# Altium PCB PCB1.PcbDoc
Units mm, origin at the board's own origin, x right, y up, seen from the top; angles counter-clockwise.
Board outline 122.6 x 54.1 mm, 2 copper layers (Top Layer, Bottom Layer), stack 1.57 mm thick; 51 components, 44 nets, 154 pads, 10 vias.
Unrouted connection lines stored in the file: 38.
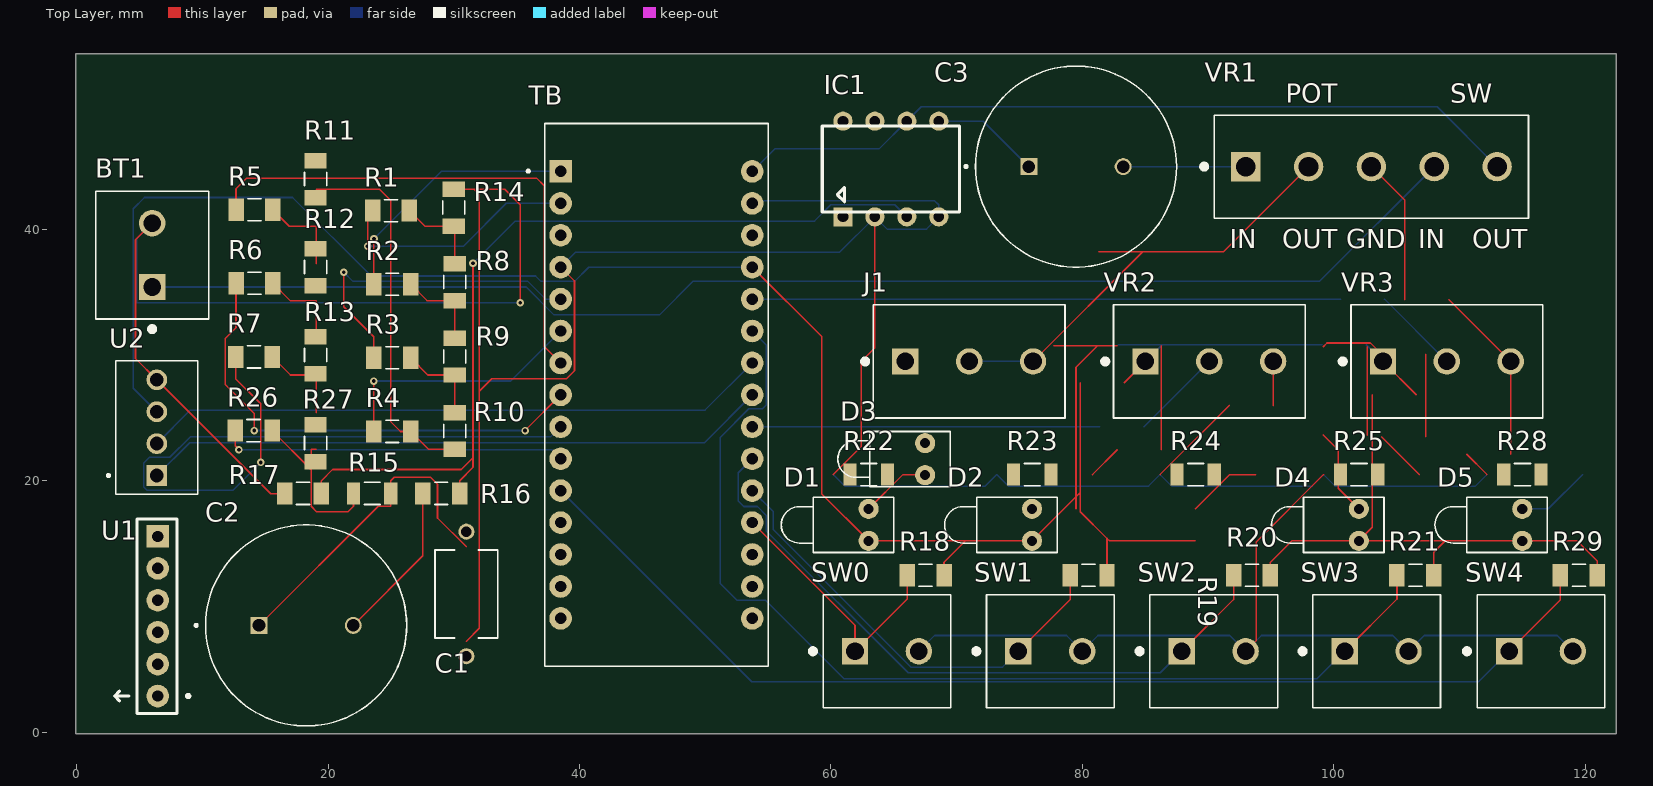
[diagram p0: Top Layer view]
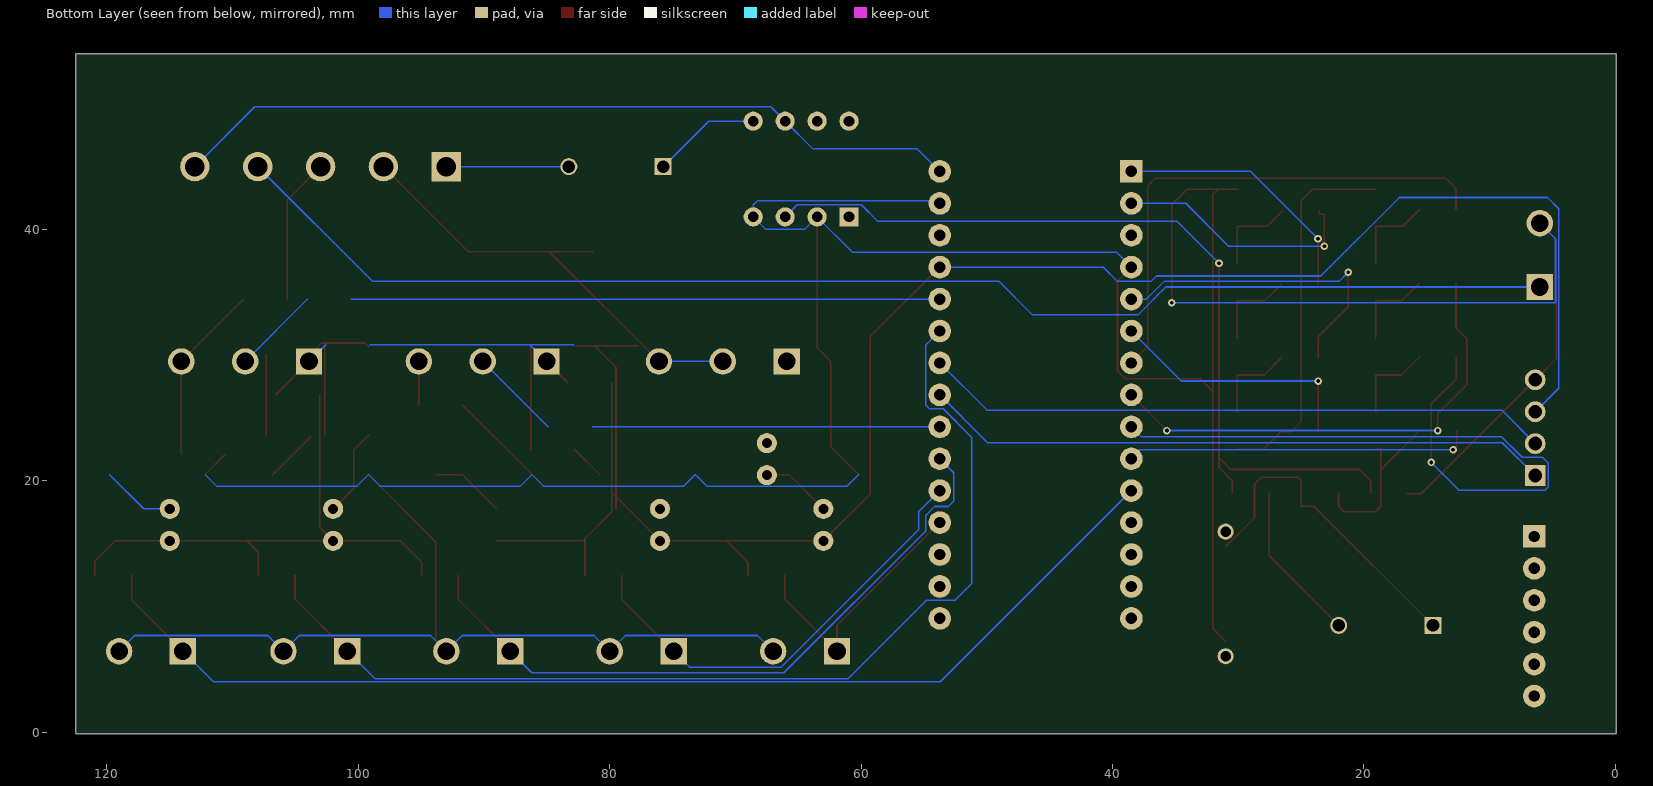
[diagram p1: Bottom Layer view, seen from below]
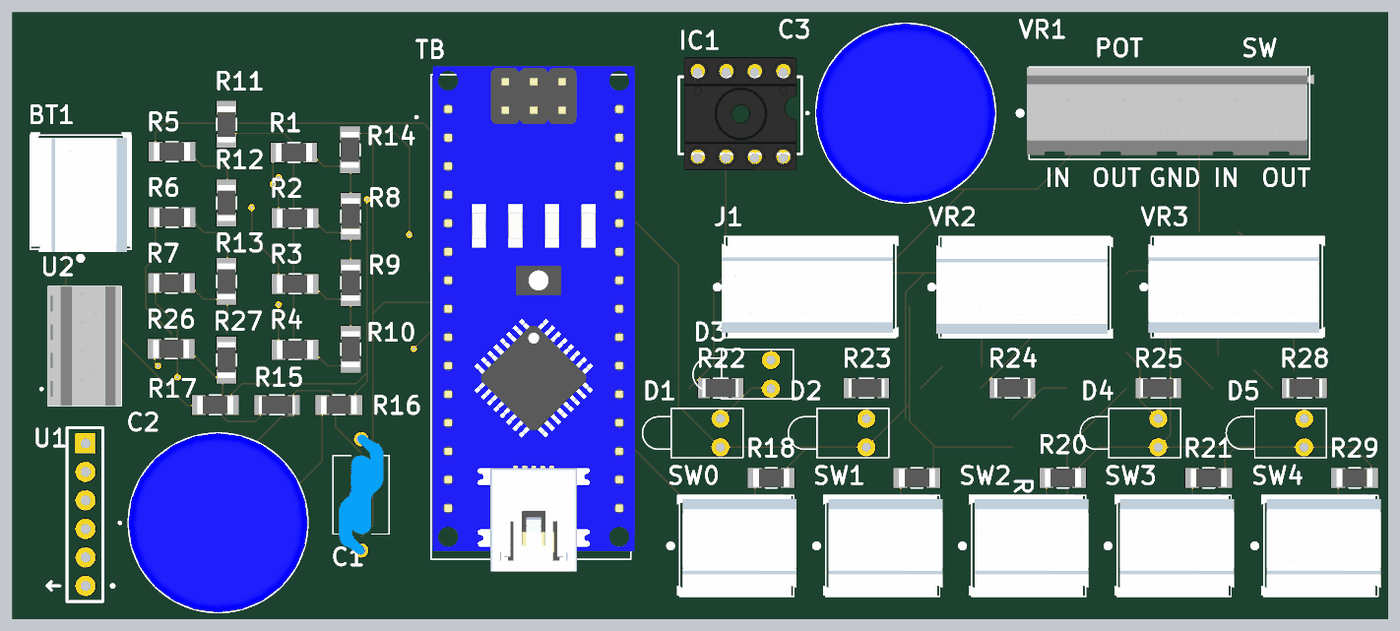
[diagram p2: 3D render of the assembled board from above, using the file's embedded part models]

## Layer stack, top to bottom
Top Solder: solder mask 0.0127, Solder Resist, Dk 3.8
Top Layer: signal copper 0.035
Dielectric: core 1.5, FR-4, Dk 4.5
Bottom Layer: signal copper 0.035
Bottom Solder: solder mask 0.0127, Solder Resist, Dk 3.8

## Board outline
-0.1,-0.1 122.5,-0.1 122.5,54 -0.1,54

## Design rules (kind name [scope] priority, off if disabled: settings)
BoardOutlineClearance [All] p1: gap=0.2 ignorepadtopadclearanceinfootprint=FALSE
Clearance [All] p1: gap=0.127 ignorepadtopadclearanceinfootprint=FALSE except(0.25: Arc-Hole Track-Hole SMDPad-Hole THPad-Hole Via-Hole Fill-Hole Poly-Hole Region-Hole Text-Hole)
ComponentClearance [All] p1: gap=0.127 collisioncheckmode=3 verticalgap=0.127 showdistances=TRUE
DiffPairsRouting [All] p1: maxlimit=0.254 minlimit=0.127 mostfreqgap=0.127 toplayer_minwidth=0.127 toplayer_maxwidth=25.4 toplayer_prefwidth=0.127 bottomlayer_minwidth=0.127 bottomlayer_maxwidth=25.4 bottomlayer_prefwidth=0.127 maxuncoupledlength=12.7
Height [All] p1: minheight=0 maxheight=1816.048 prefheight=12.7
HoleSize [All] p1: absolutevalues=TRUE maxlimit=6.3 minlimit=0.3 maxpercent=80.000 minpercent=20.000
HoleToHoleClearance [All] p1: gap=0.25 allowstackedmicrovias=FALSE
MinimumAnnularRing [All] p1: minimumring=0.076
MinimumSolderMaskSliver [All] p1: minsoldermaskwidth=0
PlaneClearance [All] p1: clearance=0.127
PlaneConnect PlaneConnectPowerPads [InPadClass('PowerPads')] p1: planeconnectstyle=Direct reliefexpansion=0.508 reliefentries=4 reliefconductorwidth=0.254 reliefairgap=0.254
PlaneConnect [All] p2: pad.planeconnectstyle=Relief pad.reliefexpansion=0.3 pad.reliefentries=4 pad.reliefconductorwidth=0.127 pad.reliefairgap=0.127 via.planeconnectstyle=Direct via.reliefexpansion=0.3 via.reliefentries=4 via.reliefconductorwidth=0.127 via.reliefairgap=0.127
PolygonConnect PolygonConnectPowerPads [All vs (InPadClass('PowerPads'))] p1: connectstyle=Direct reliefconductorwidth=0.254 reliefentries=4 polygonreliefangle="90 Angle" airgapwidth=0.254
PolygonConnect [All] p2: thpad.connectstyle=Relief thpad.reliefconductorwidth=0.127 thpad.reliefentries=4 thpad.polygonreliefangle="90 Angle" thpad.airgapwidth=0.127 smdpad.connectstyle=Relief smdpad.reliefconductorwidth=0.127 smdpad.reliefentries=4 smdpad.polygonreliefangle="90 Angle" smdpad.airgapwidth=0.127 via.connectstyle=Direct via.reliefconductorwidth=0.127 via.reliefentries=4 via.polygonreliefangle="90 Angle" via.airgapwidth=0.127
RoomDefinition Sheet1 [InComponentClass('Sheet1')] p1: confinementstyle=ConfineIn formatcopy=TRUE lockcomponents=FALSE outline 153.443,1.297 241.454,1.297 241.454,49.938 153.443,49.938
RoomDefinition Sheet2 [InComponentClass('Sheet2')] p2: confinementstyle=ConfineIn formatcopy=TRUE lockcomponents=FALSE outline 163.785,61.379 494.112,61.379 494.112,80.937 163.785,80.937
RoutingVias [All] p1: holewidth=0.3 width=0.6 viastyle="Through Hole" minholewidth=0.3 minwidth=0.6 maxholewidth=0.6 maxwidth=6.6
SilkToSilkClearance [All] p1: silktosilkclearance=0
SilkToSolderMaskClearance [IsPad] p1: minsilkscreentomaskgap=0.127 clearancetoexposedcopper=TRUE
SolderMaskExpansion [All] p1: expansion=0.075 istentingtop=FALSE
Width [All] p1: maxlimit=25.4 minlimit=0.127 preferedwidth=0.127 minimp=50.000000 maximp=50.000000 favimp=50.000000
20 further rules are at their usual default settings.

## Classes and differential pairs
component class Sheet2: BT1 C1 C2 D1 D2 D3 D4 D5 J1 R1 R2 R3 R4 R5 R6 R7 R8 R9 R10 R11 R12 R13 R14 R15 R16 R18 R19 R20 R21 R22 R23 R24 R25 R26 R27 R28 R29 SW0 SW1 SW2 SW3 SW4 VR2 VR3
component class Sheet1: C3 IC1 R17 TB U1 U2 VR1

## Components (designator, comment, footprint, x,y, rotation, side; value= is the part's Value field where it differs from the comment)
BT1 "9V BATTERY" "9V Battery" 6,37.96 r90 top
C1 "0.01uF CAP" "10uF CAP" 31,11 r270 top
C2 "220uF CAP" "220uF CAP" 18.25,8.5 r0 top
C3 "220uF CAP" "220uF CAP" 79.5,45 r0 top
D1 "LED0" LED-1 63,16.5 r180 top
D2 "LED1" LED-1 76,16.5 r180 top
D3 "LED2" LED-1 67.5,21.73 r180 top
D4 "LED3" LED-1 102,16.5 r180 top
D5 "LED3" LED-1 115,16.5 r180 top
IC1 "LM386 SOCKET" "LM386 SOCKET" 60.96,41 r0 top
J1 "AUDIO JACK" "AUDIO JACK" 71,29.5 r0 top
R1 "20K RES" "20K RES" 25,41.5 r0 top
R2 "20K RES" "20K RES" 25.103,35.643 r0 top
R3 "20K RES" "20K RES" 25.103,29.786 r0 top
R4 "20K RES" "20K RES" 25.103,23.929 r0 top
R5 "20K RES" "20K RES" 14.137,41.571 r0 top
R6 "20K RES" "20K RES" 14.137,35.714 r0 top
R7 "20K RES" "20K RES" 14.103,29.857 r0 top
R8 "10K RES" "10K RES" 30.069,35.811 r90 top
R9 "10K RES" "10K RES" 30.069,29.888 r90 top
R10 "10K RES" "10K RES" 30.069,23.966 r90 top
R11 "10K RES" "10K RES" 19,44 r90 top
R12 "10K RES" "10K RES" 19,37 r90 top
R13 "10K RES" "10K RES" 19,30 r90 top
R14 "20K RES" "20K RES" 30,41.733 r90 top
R15 "300 RES" "300 RES" 23.5,19 r0 top
R16 "20K RES" "20K RES" 29,19 r0 top
R17 "4.7K RES" "4.7K RES" 18,19 r180 top
R18 "10K RES" "10K RES" 67.534,12.5 r0 top
R19 "10K RES" "10K RES" 80.5,12.5 r0 top
R20 "10K RES" "10K RES" 93.5,12.5 r0 top
R21 "10K RES" "10K RES" 106.5,12.5 r0 top
R22 "150 RES" "150 RES" 63.015,20.5 r180 top
R23 "150 RES" "150 RES" 76.015,20.5 r180 top
R24 "150 RES" "150 RES" 89.015,20.5 r180 top
R25 "150 RES" "150 RES" 102.015,20.5 r180 top
R26 "20K RES" "20K RES" 14.069,24 r0 top
R27 "10K RES" "10K RES" 19,23 r90 top
R28 "150 RES" "150 RES" 115.015,20.5 r180 top
R29 "10K RES" "10K RES" 119.5,12.5 r0 top
SW0 "PUSH BUTTON" "Push Button" 64.455,6.444 r0 top
SW1 "PUSH BUTTON" "Push Button" 77.455,6.444 r0 top
SW2 "PUSH BUTTON" "Push Button" 90.455,6.444 r0 top
SW3 "PUSH BUTTON" "Push Button" 103.415,6.444 r0 top
SW4 "PUSH BUTTON" "Push Button" 116.495,6.444 r0 top
TB "ARDUINO_NANO" SHIELD_ARDUINO_NANO 46.12,26.84 r0 top
U1 "SD MODULE" "SD MODULE" 6.445,2.88 r180 top
U2 "LCD SCREEN" "LCD SCREEN" 6.368,24.23 r90 top
VR1 "POT WITH SPST" "POT WITH SPST" 93,45 r0 top
VR2 "10K POT" "10K POT" 90.104,29.5 r0 top
VR3 "50K POT" "50K POT" 109,29.5 r0 top

## Footprints (in the part's own frame and the unit in brackets; to place one, negate y for a bottom-side part, rotate by r counter-clockwise, add the part's x,y. Pads: shape width x height; smd on the part's side, far side on the other; paste and mask are expansions set on the pad)
"4.7K RES" [mm]
  rect 1.23x1.77 smd: 1(-1.466,0) 2(1.466,0)
  silkscreen extent -0.53,-0.88 0.53,0.88, body extent -1.6,-0.8 1.6,0.8, height 0.7
"9V Battery" [mm]
  rect 2.1x2.1 hole 1.4: 1(-2.54,0)
  round 2.1 hole 1.4: 2(2.54,0)
  silkscreen extent -6.09,-4.5 5.08,4.5, body extent -5.33,-4.52 5.33,4.48, height 15.2
"10K POT" [mm]
  rect 2.1x2.1 hole 1.4: 1(-5.08,0)
  round 2.1 hole 1.4: 2(0,0) 3(5.08,0)
  silkscreen extent -8.48,-4.5 7.62,4.5, body extent -7.87,-4.57 7.87,4.43, height 15.2
"10K RES" [mm]
  rect 1.23x1.77 smd: 1(-1.466,0) 2(1.466,0)
  silkscreen extent -0.53,-0.88 0.53,0.88, body extent -1.6,-0.8 1.6,0.8, height 0.7
"10uF CAP" [mm]
  round 1.28 hole 0.85: 1(-4.953,0) 2(4.953,0)
  silkscreen extent -3.5,-2.5 3.5,2.5, body extent -5.33,-2 5.33,2, height 10
"20K RES" [mm]
  rect 1.23x1.77 smd: 1(-1.466,0) 2(1.466,0)
  silkscreen extent -0.53,-0.88 0.53,0.88, body extent -1.6,-0.8 1.6,0.8, height 0.7
"50K POT" [mm]
  rect 2.1x2.1 hole 1.4: 1(-5.08,0)
  round 2.1 hole 1.4: 2(0,0) 3(5.08,0)
  silkscreen extent -8.48,-4.5 7.62,4.5, body extent -7.87,-4.44 7.87,4.56, height 15.2
"150 RES" [mm]
  rect 1.05x1.77 smd: 1(-1.485,0) 2(1.485,0)
  silkscreen extent -0.64,-0.88 0.64,0.88, body extent -1.6,-0.8 1.6,0.8, height 0.6
"220uF CAP" [mm]
  round 1.35 hole 1: N(3.75,0)
  rect 1.35x1.35 hole 1: P(-3.75,0)
  silkscreen extent -8.85,-8 8,8, body extent -8,-8 8,8, height 27
"300 RES" [mm]
  rect 1.05x1.77 smd: 1(-1.485,0) 2(1.485,0)
  silkscreen extent -0.64,-0.88 0.64,0.88, body extent -1.6,-0.8 1.6,0.8, height 0.6
"AUDIO JACK" [mm]
  rect 2.1x2.1 hole 1.4: 1(-5.08,0)
  round 2.1 hole 1.4: 2(0,0) 3(5.08,0)
  silkscreen extent -8.48,-4.5 7.62,4.5, body extent -7.87,-4.44 7.87,4.56, height 15.2
"LCD SCREEN" [mm]
  rect 1.65x1.65 hole 1.1: 1(-3.81,0)
  round 1.65 hole 1.1: 2(-1.27,0) 3(1.27,0) 4(3.81,0)
  silkscreen extent -5.31,-3.25 5.31,3.95, body extent -5.31,-3.25 5.31,3.25, height 10
LED-1 [mm] "LED; 2 Leads"
  round 1.6 hole 0.8: 1(0,1.27) 2(0,-1.27)
  silkscreen extent -2,-2.2 6.95,2.2
"LM386 SOCKET" [mil] "8 pin socket for LM386"
  rect 60x60 hole 33.07 mask+4: 1(0,0)
  round 60 hole 33.07 mask+4: 2(100,0) 3(200,0) 4(300,0) 5(300,300) 6(200,300) 7(100,300) 8(0,300)
  silkscreen extent -65,15 365,285, body extent -49,-44 349,354, height 110
"POT WITH SPST" [mm]
  rect 2.34x2.34 hole 1.56: 1(0,0)
  round 2.34 hole 1.56: 2(5,0) 3(10,0) 4(15,0) 5(20,0)
  silkscreen extent -3.5,-4.1 22.5,4.1, body extent -2.72,-4.14 22.88,4.06, height 5
"Push Button" [mm]
  rect 2.1x2.1 hole 1.4: 1(-2.54,0)
  round 2.1 hole 1.4: 2(2.54,0)
  silkscreen extent -6.09,-4.5 5.08,4.5, body extent -5.33,-4.43 5.33,4.57, height 15.2
"SD MODULE" [mm]
  round 1.8 hole 0.9: 1(0,0) 1(0,0) 2(0,-2.54) 2(0,-2.54) 3(0,-5.08) 3(0,-5.08) 4(0,-7.62) 4(0,-7.62) 5(0,-10.16) 5(0,-10.16) 6(0,-12.7)
  rect 1.8x1.8 hole 0.9: 6(0,-12.7)
  silkscreen extent -2.54,-14.1 3.43,1.4
SHIELD_ARDUINO_NANO [mm]
  rect 1.8x1.8 hole 0.9: 1(-7.62,17.78)
  round 1.8 hole 0.9: 2(-7.62,15.24) 3(-7.62,12.7) 4(-7.62,10.16) 5(-7.62,7.62) 6(-7.62,5.08) 7(-7.62,2.54) 8(-7.62,0) 9(-7.62,-2.54) 10(-7.62,-5.08) 11(-7.62,-7.62) 12(-7.62,-10.16) 13(-7.62,-12.7) 14(-7.62,-15.24) 15(-7.62,-17.78) 16(7.62,-17.78) 17(7.62,-15.24) 18(7.62,-12.7) 19(7.62,-10.16) 20(7.62,-7.62) 21(7.62,-5.08) 22(7.62,-2.54) 23(7.62,0) 24(7.62,2.54) 25(7.62,5.08) 26(7.62,7.62) 27(7.62,10.16) 28(7.62,12.7) 29(7.62,15.24) 30(7.62,17.78)
  silkscreen extent -10.3,-21.59 8.89,21.59, body extent -8.75,-22.67 9.25,22.33, height 10.1

## Part data
C1: "Lead Capacitor E(JIS) with Capacitance: 1000pF and Rated Voltage: 400Vac(r.m.s.)", Package="Radial Murata", Digi-Key_Part_Number=490-16237-1-ND, MF=Murata, Mouser-Purchase-URL=https://snapeda.com/shop?store=Mouser&id=4546572, MP=DE2E3SA102MN3AY02F, SnapEDA_Link=https://www.snapeda.com/parts/DE2E3SA102MN3AY02F/Murata/view-part/4546572/?ref=snap
C2 C3: "33ÂµF 250V Aluminum Electrolytic Capacitors Radial, Can 5000 Hrs @ 105Â°C", Package="Radial Nichicon", Availability=Warning, Check_prices=https://www.snapeda.com/parts/UPM2E330MHD1TN/Nichicon/view-part/2353634/?ref=eda, MF=Nichicon, MP=UPM2E330MHD1TN, Price=None, Purchase-URL=https://pricing.snapeda.com/search/part/UPM2E330MHD1TN/?ref=eda, SnapEDA_Link=https://www.snapeda.com/parts/UPM2E330MHD1TN/Nichicon/view-part/2353634/?ref=snap
D1 D3 D4 D5: library part LED1, "Typical RED GaAs LED", LatestRevisionDate=08-Jul-2005, LatestRevisionNote="Mech Layer 1 removed.", PackageDescription="LED; 2 Leads", PackageReference=LED-1, Published=8-Jun-2000, Publisher="Altium Limited"
D2: "Typical RED GaAs LED", LatestRevisionDate=08-Jul-2005, LatestRevisionNote="Mech Layer 1 removed.", PackageDescription="LED; 2 Leads", PackageReference=LED-1, Published=8-Jun-2000, Publisher="Altium Limited"
IC1: "8 pin IC socket for LM386"
J1: "3.5 mm, Stereo, Right Angle, Through Hole, Audio Jack Connector", Package=None, Availability=Unavailable, CUI_purchase_URL=https://www.cuidevices.com/product/interconnect/connectors/audio-connectors/jacks/sj1-353xn-series?utm_source=snapeda.com&utm_medium=referral&utm_campaign=snapedaBOM, MF="CUI Devices", MP=SJ1-3533N, Price=None, SnapEDA_Link=https://www.snapeda.com/parts/SJ1-3533N/CUI%20Devices/view-part/554489/?ref=snap
R1 R2 R3 R4 R5 R6 R7 R14 R16 R17 R26: Package=None, Availability=Unavailable, Price=None
  R1 R2 R3 R4 R5 R6 R7 R14 R16 R26: MP=RMCF1206JT20K0
  R17: MP=RMCF1206FT4K70
R8 R9 R10 R11 R12 R13 R18 R19 R20 R21 R27 R29: "10 kOhms Â±1% 0.25W, 1/4W Chip Resistor 1206 (3216 Metric) Automotive AEC-Q200 Thick Film", Package="3216 Stackpole", Check_prices=https://www.snapeda.com/parts/RMCF1206FT10K0/Stackpole%20Electronics%20Inc/view-part/3955491/?ref=eda, Digi-Key_Part_Number=RMCF1206FT10K0CT-ND, MF="Stackpole Electronics Inc", MP=RMCF1206FT10K0, Purchase-URL=https://pricing.snapeda.com/search/part/RMCF1206FT10K0/?ref=eda, SnapEDA_Link=https://www.snapeda.com/parts/RMCF1206FT10K0/Stackpole%20Electronics%20Inc/view-part/3955491/?ref=snap
R15: "CRCW Series 1206 0.25 W 300 Ohm Â±5 % Â±200 ppm/K SMT Thick Film Chip Resistor", Package=None, Availability=Unavailable, MP=CRCW1206300RJNEA, Price=None
R22 R23 R24 R25 R28: "Through Hole Carbon Film Resistor, Cfr Series, 150 Ohm, 500 Mw, - 5%, 350 V, Axial Leaded", Package="Axial TE Connectivity", Availability=Good, Check_prices=https://www.snapeda.com/parts/CFR50J150R/TE%20Connectivity/view-part/2667839/?ref=eda, MF="TE Connectivity", MP=CFR50J150R, Price=None, Purchase-URL=https://pricing.snapeda.com/search/part/CFR50J150R/?ref=eda, SnapEDA_Link=https://www.snapeda.com/parts/CFR50J150R/TE%20Connectivity/view-part/2667839/?ref=snap
SW0 SW1 SW2 SW3 SW4: "Push Button"
TB: "ATSAMD21G18A Arduino Nano 33 IoT SAM D ARMÂ® CortexÂ®-M0+ MCU 32-Bit Embedded Evaluation Board", Package=None, Availability=Unavailable, MF=Arduino, MP="ARDUINO NANO", Price=None, SnapEDA_Link=https://www.snapeda.com/parts/ARDUINO%20NANO/Arduino/view-part/1128261/?ref=snap
VR1: "Potentiometer with SPST Switch"
VR2: "POT 10K OHM 1/10W PLASTIC LOG", Package=None, Digi-Key_Part_Number=987-1304-ND, Digi-Key_Purchase_URL=https://www.digikey.cz/product-detail/en/tt-electronics-bi/P160KN-0QC15B500K/987-1304-ND/2408881?utm_source=snapeda&utm_medium=aggregator&utm_campaign=symbol, MF="TT Electronics/BI", MP=P160KN-0QC15B500K, SnapEDA_Link=https://www.snapeda.com/parts/P160KN-0QC15B500K/TT%20Electronics/BI/view-part/903272/?ref=snap
VR3: "POT 50K OHM 1/5W PLASTIC LINEAR", Package=None, Digi-Key_Part_Number=987-1304-ND, Digi-Key_Purchase_URL=https://www.digikey.cz/product-detail/en/tt-electronics-bi/P160KN-0QC15B500K/987-1304-ND/2408881?utm_source=snapeda&utm_medium=aggregator&utm_campaign=symbol, MF="TT Electronics/BI", MP=P160KN-0QC15B500K, SnapEDA_Link=https://www.snapeda.com/parts/P160KN-0QC15B500K/TT%20Electronics/BI/view-part/903272/?ref=snap

## Via types
v1: diameter 0.6, hole 0.3, Top Layer to Bottom Layer, 10 vias

## Nets (pads, with @x,y where several pads share a name; then routed paths per layer and width w, separated by ;. In a path a pad name is that pad's centre, name@x,y a point inside that pad or via, vN(x,y) a via of type N, cw(c..) or ccw(c..) an arc to the next point about the centre after c; other vN are vias at no path point)
5V: D1.1 D2.1 D3.1 D4.1 D5.1 R18.2 R19.2 R20.2 R21.2 R29.2 TB.27 U1.6 U2.3 VR2.1 VR3.1 | length 230.1
  Top Layer w0.127: TB.27 59.285,31.455 59.285,18.945 D1.1 70.716,15.23 ; R18.2 69,13.514 70.716,15.23 ; 77.726,30.761 81.226,30.761 ; 79.5,17.77 79.5,18.73 ; 79.834,27.81 79.834,19.064 ; R19.2 81.966,15.419 ; 82.78,30.761 81.226,30.761 ; 83.334,27.81 VR2.1 ; 89,15.23 82.155,15.23 81.966,15.419 ; R20.2 94.966,13.514 96.682,15.23 D4.1 ; 103.075,26.845 103.075,16.305 D4.1 ; VR3.1 106.575,26.845 ; R21.2 107.966,14.327 108.869,15.23 ; R29.2 120.966,13.63 119.366,15.23 D5.1 108.869,15.23 ; 70.716,15.23 D2.1 79.5,18.73 ; 79.5,18.73 79.5,29.035 81.226,30.761 ; 79.5,18.73 79.834,19.064 ; 79.834,19.064 79.834,17.552 81.966,15.419 ; D4.1 108.869,15.23
  Bottom Layer w0.127: U2.3 4.497,27.371 4.497,41.658 5.386,42.547 17.172,42.547 23.42,36.298 36.501,36.298 36.933,35.866 39.6,35.866 40.734,37 TB.27 ; 82.861,30.837 99.083,30.837 ; VR2.1 86.361,30.837 ; 102.583,30.837 VR3.1
+Input: IC1.3 R16.2 R17.1 | length 69.4
  Top Layer w0.127: R17.1 19.466,20.017 20.355,20.906 30.583,20.906 31.523,21.846 ; R16.2 30.466,20.017 31.523,21.074 31.523,21.846 ; v1(31.523,37.314) 31.523,21.846
  Bottom Layer w0.127: v1(31.523,37.314) 34.876,40.667 58.701,40.667 59.996,41.962 65.078,41.962 IC1.3
A0: R18.1 SW0.1 TB.19 | length 21.4
  Top Layer w0.127: TB.19 61.915,8.505 SW0.1 66.068,10.597 R18.1
A1: R19.1 SW1.1 TB.20 | length 36.1
  Top Layer w0.127: SW1.1 79.034,10.563 R19.1
  Bottom Layer w0.127: TB.20 55.424,17.536 55.424,16.105 66.346,5.183 73.654,5.183 SW1.1
A2: R20.1 SW2.1 TB.21 | length 54
  Top Layer w0.127: SW2.1 92.034,10.563 R20.1
  Bottom Layer w0.127: TB.21 52.63,20.65 52.63,18.391 53.062,17.959 54.154,17.959 54.866,17.248 54.866,16.004 66.143,4.726 86.197,4.726 SW2.1
A3: TB.22 VR2.2 | length 35
  Bottom Layer w0.127: TB.22 81.404,24.3 ; 84.904,24.3 VR2.2
A6: R21.1 SW3.1 TB.25 | length 84.2
  Top Layer w0.127: SW3.1 105.034,10.603 R21.1
  Bottom Layer w0.127: TB.25 54.84,30.82 54.84,26.011 54.561,25.732 53.469,25.732 51.208,23.471 51.208,11.813 52.529,10.492 54.789,10.492 61.012,4.269 98.7,4.269 SW3.1
A7: TB.26 VR3.2 | length 53.8
  Bottom Layer w0.127: TB.26 100.54,34.46 ; 104.04,34.46 VR3.2
"Audio In": C3.N VR1.1 | length 9.7
  Bottom Layer w0.127: C3.N VR1.1
"Audio Out": J1.2 J1.3 VR1.2 | length 36.9
  Top Layer w0.127: J1.3 84.809,38.229 ; 81.309,38.229 91.229,38.229 VR1.2
  Bottom Layer w0.127: J1.2 J1.3
D0: R1.1 TB.2 | length 20
  Top Layer w0.127: v1(23.141,38.66) 23.141,41.226 23.534,41.226 R1.1
  Bottom Layer w0.127: v1(23.141,38.66) 30.761,38.66 34.181,42.08 TB.2
D1: R2.1 TB.1 | length 20.7
  Top Layer w0.127: R2.1 23.637,39.258 v1(23.649,39.27)
  Bottom Layer w0.127: v1(23.649,39.27) 28.999,44.62 TB.1
D2: R3.1 TB.5 | length 26
  Top Layer w0.127: v1(21.236,36.603) 21.236,33.86 23.637,31.459 R3.1
  Bottom Layer w0.127: v1(21.236,36.603) 21.973,35.866 35.892,35.866 37.298,34.46 TB.5
D3: R4.1 TB.6 | length 20.5
  Top Layer w0.127: R4.1 v1(23.637,27.942)
  Bottom Layer w0.127: v1(23.637,27.942) 34.522,27.942 TB.6
D4: R5.1 TB.7 | length 41.4
  Top Layer w0.127: R5.1 12.671,43.247 13.514,44.091 36.583,44.091 37.187,43.486 37.187,30.693 TB.7
D5: R6.1 TB.8 | length 38.6
  Top Layer w0.127: R6.1 12.671,32.178 11.813,31.32 11.813,27.662 14.124,25.351 v1(14.124,24.005) ; v1(35.665,24.005) TB.8
  Bottom Layer w0.127: v1(14.124,24.005) v1(35.665,24.005)
D6: R7.1 TB.9 | length 55.8
  Top Layer w0.127: R7.1 12.637,28.119 14.632,26.124 v1(14.632,21.465)
  Bottom Layer w0.127: v1(14.632,21.465) 12.422,19.255 5.59,19.255 5.336,19.509 5.336,21.414 5.793,21.871 7.393,21.871 9.019,23.497 37.697,23.497 TB.9
D7: R26.1 TB.10 | length 27.5
  Top Layer w0.127: R26.1 12.603,22.782 v1(12.905,22.481)
  Bottom Layer w0.127: v1(12.905,22.481) 37.779,22.481 TB.10
D8: R29.1 SW4.1 TB.11 | length 90.5
  Top Layer w0.127: SW4.1 118.034,10.523 R29.1
  Bottom Layer w0.127: TB.11 53.705,4.015 111.526,4.015 SW4.1
GND: BT1.2 C1.2 IC1.2 IC1.4 J1.1 R14.2 R17.2 R22.1 R23.1 R24.1 R25.1 R28.1 SW0.2 SW1.2 SW2.2 SW3.2 SW4.2 TB.4 TB.29 U1.5 U2.4 VR1.3 VR2.3 VR3.3 | length 359.9
  Top Layer w0.127: BT1.2 4.675,39.175 4.675,29.733 U2.4 15.433,18.975 16.534,18.975 R17.2 ; R14.2 31.607,43.199 ; 31,7.25 32.031,8.281 32.031,27.129 ; v1(35.282,34.165) 35.282,41.962 34.046,43.199 31.607,43.199 ; TB.4 39.6,35.9 39.6,28.754 38.965,28.119 33.022,28.119 32.031,27.129 ; 60.19,20.5 62.42,22.73 62.42,29.5 63.5,30.58 IC1.2 ; SW2.2 93.855,7.304 93.855,15.165 99.19,20.5 ; 95.184,25.994 VR2.3 ; VR1.3 105.666,42.334 105.666,34.414 ; 109.166,34.414 VR3.3 114.08,22.11 ; 31.607,43.199 32.031,42.775 32.031,27.129
  Bottom Layer w0.127: BT1.2 4.751,39.251 4.751,34.165 v1(35.282,34.165) ; TB.4 39.703,38.203 60.703,38.203 IC1.2 64.468,40.032 67.612,40.032 IC1.4 68.58,41.962 68.25,42.293 53.953,42.293 TB.29 ; 60.19,20.5 61.105,19.585 72.275,19.585 73.19,20.5 74.105,19.585 85.275,19.585 86.19,20.5 87.105,19.585 98.275,19.585 99.19,20.5 100.105,19.585 111.275,19.585 112.19,20.5 ; SW0.2 68.249,7.698 78.741,7.698 SW1.2 81.249,7.698 91.741,7.698 SW2.2 94.249,7.698 104.701,7.698 SW3.2 107.209,7.698 117.781,7.698 SW4.2
"LP Filter": R15.1 R26.2 R27.1 | length 14.1
  Top Layer w0.127: R26.2 18.645,20.89 ; 19.069,22.5 18.645,22.5 18.645,20.89 ; R15.1 22.015,17.985 21.558,17.528 19.102,17.528 18.645,17.985 18.645,20.89
MISO: TB.15 U1.1
MOSI: TB.14 U1.4
NetC1_1: C1.1 C2.P R15.2 | length 26.5
  Top Layer w0.127: C2.P 23.985,17.985 24.985,17.985 R15.2 24.985,20.017 25.264,20.296 28.145,20.296 28.704,19.737 28.704,17.046 31,14.75
NetC2_N: C2.N R16.1 | length 12.8
  Top Layer w0.127: C2.N 27.534,14.034 R16.1
NetC3_P: C3.P IC1.5 | length 8.7
  Bottom Layer w0.127: IC1.5 72.13,48.62 C3.P
NetD1_2: D1.2 R22.2 | length 5.9
  Top Layer w0.127: D1.2 65.73,20.5 67.81,20.5
NetD2_2: D2.2 R23.2 | length 8.3
  Top Layer w0.127: 86.28,22.47 86.28,30.761
NetD3_2: D3.2 R24.2 | length 5.9
  Top Layer w0.127: 89,17.77 91.73,20.5 93.81,20.5
NetD4_2: D4.2 R25.2 | length 25.8
  Top Layer w0.127: 99.163,23.649 100.357,22.455 100.357,19.413 D4.2 ; 99.163,30.659 99.468,30.964 102.922,30.964 103.811,30.075 ; 102.663,23.649 102.663,30.659 ; 107.311,23.499 107.311,30.075
NetD5_2: D5.2 R28.2 | length 5.9
  Bottom Layer w0.127: D5.2 117.08,17.77 119.81,20.5
NetR1_2: R1.2 R8.2 R14.1 | length 7.1
  Top Layer w0.127: R1.2 27.699,40.267 R14.1 30.069,40.198 30.069,38.737 R8.2
NetR2_2: R2.2 R8.1 R9.2 | length 7
  Top Layer w0.127: R2.2 27.867,34.345 R8.1 R9.2
NetR3_2: R3.2 R9.1 R10.2 | length 7.1
  Top Layer w0.127: R3.2 27.932,28.422 R9.1 R10.2
NetR4_2: R4.2 R10.1 R11.2 | length 29.9
  Top Layer w0.127: 19.069,43.199 24.081,43.199 24.995,42.285 24.995,24.69 25.757,23.928 R4.2 27.998,22.5 R10.1
NetR5_2: R5.2 R11.1 R12.2 | length 7
  Top Layer w0.127: R5.2 16.907,40.267 19.069,40.267 19.069,37.277
NetR6_2: R6.2 R12.1 R13.2 | length 7
  Top Layer w0.127: R6.2 16.973,34.345 19.069,34.345 R13.2@19.069,31.354
NetR7_2: R7.2 R13.1 R27.2 | length 7.1
  Top Layer w0.127: R7.2 17.004,28.422 19.069,28.422 19.069,25.432
SCK: TB.16 U1.2
SCL: TB.24 U2.2 | length 50
  Bottom Layer w0.127: U2.2 9.038,25.63 49.99,25.63 TB.24
SDA: TB.23 U2.1 | length 50
  Bottom Layer w0.127: U2.1 8.988,23.039 49.939,23.039 TB.23
SS: TB.13 U1.3
VCC: BT1.1 VR1.4 | length 107.8
  Bottom Layer w0.127: BT1.1 35.754,35.42 37.975,33.199 46.357,33.199 49.049,35.892 98.892,35.892 VR1.4
Vin: IC1.6 TB.30 VR1.5 | length 63.4
  Bottom Layer w0.127: TB.30 55.527,46.407 63.827,46.407 IC1.6 67.18,49.76 108.24,49.76 VR1.5
pads on no net: IC1.1 IC1.7 IC1.8 TB.3 TB.12 TB.17 TB.18 TB.28
copper on no net: | length 17.1
  Top Layer w0.127: 80.81,20.5 82.78,22.47 ; 86.19,20.5 91.684,25.994 ; 103.811,23.499 106.81,20.5 ; 110.58,22.11 112.19,20.5

## Text inside footprints (layer, text, board x,y; h text height)
VR1: Top Overlay "SW" at 109.256,50.08 h1.52; Top Overlay "POT" at 96.175,50.08 h1.52; Top Overlay "OUT" at 111.034,38.523 h1.52; Top Overlay "IN" at 106.716,38.523 h1.52; Top Overlay "GND" at 101.001,38.523 h1.52; Top Overlay "OUT" at 95.921,38.523 h1.52; Top Overlay "IN" at 91.73,38.523 h1.52